# Altium PCB lab11.PcbDoc
Units mil, origin at the board's own origin, x right, y up, seen from the top; angles counter-clockwise.
Board outline 12125.98 x 8622.05 mil, 2 copper layers (Top Layer, Top, Bottom Layer, Bottom); 15 components, 10 nets, 39 pads, 0 vias.
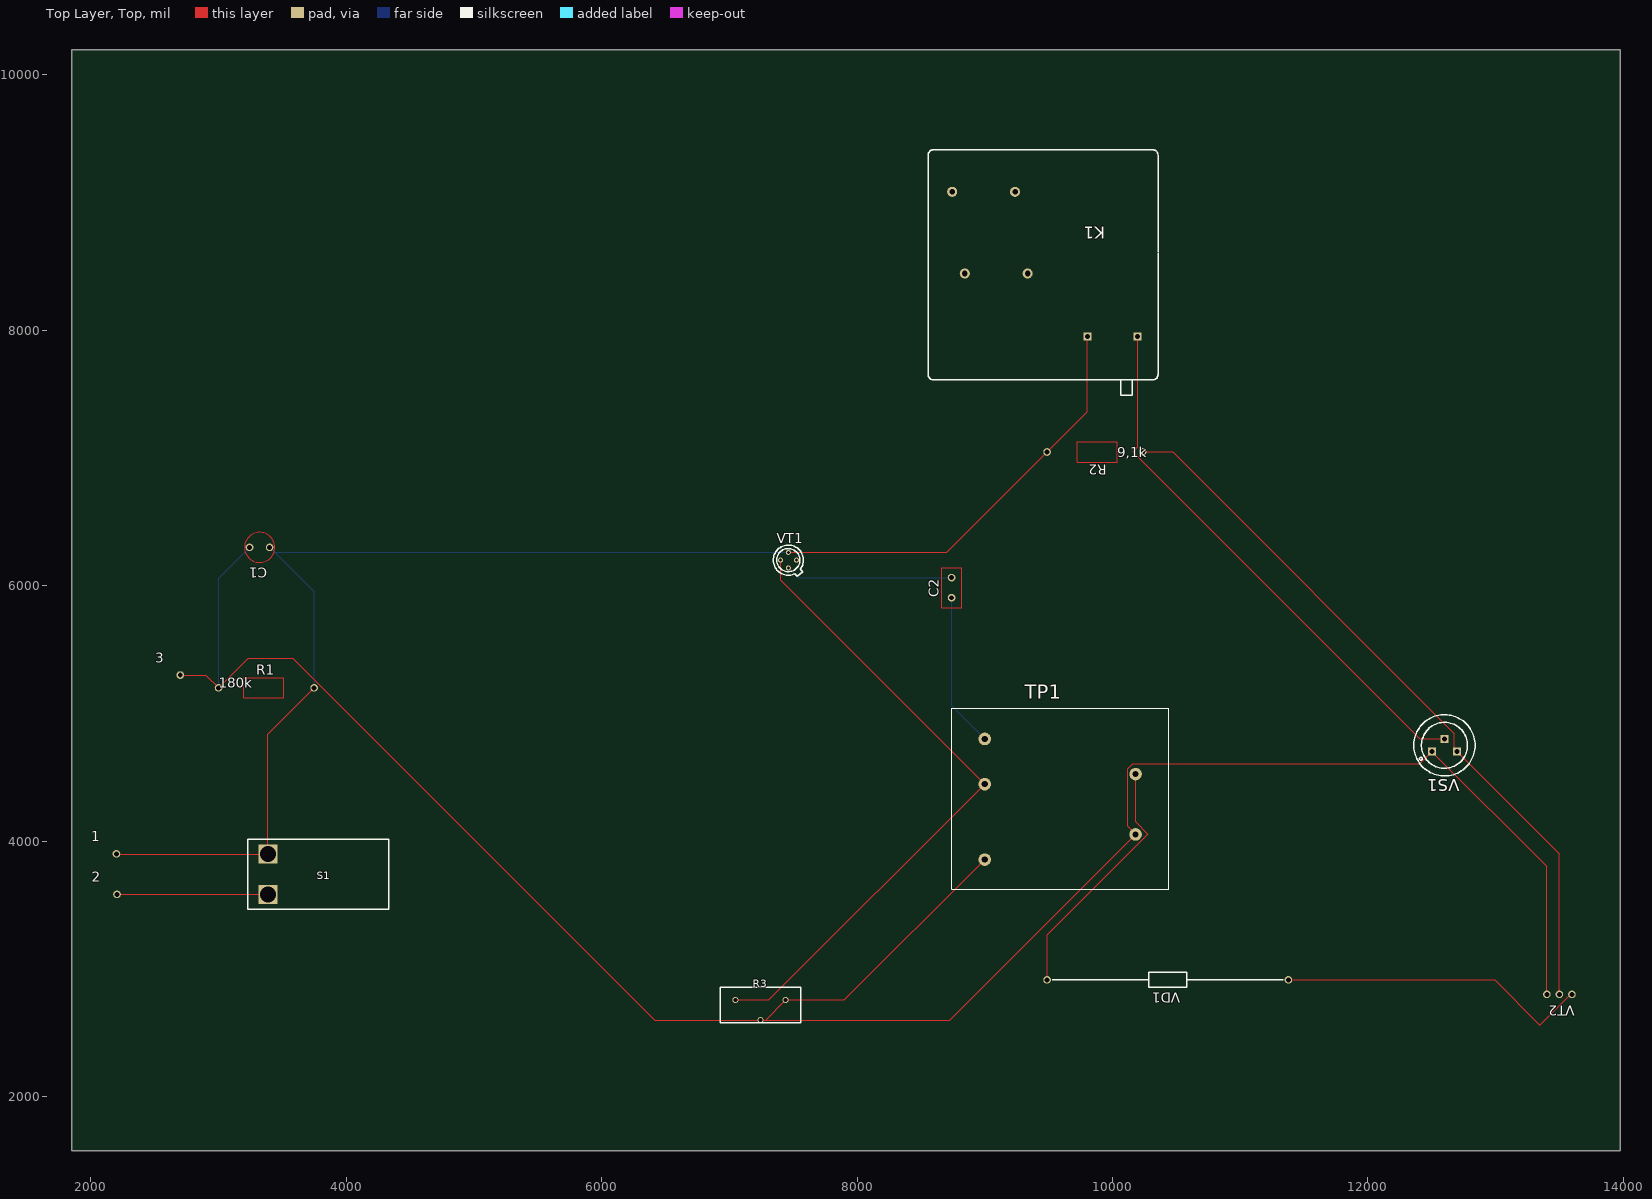
[diagram p0: Top Layer, Top view]
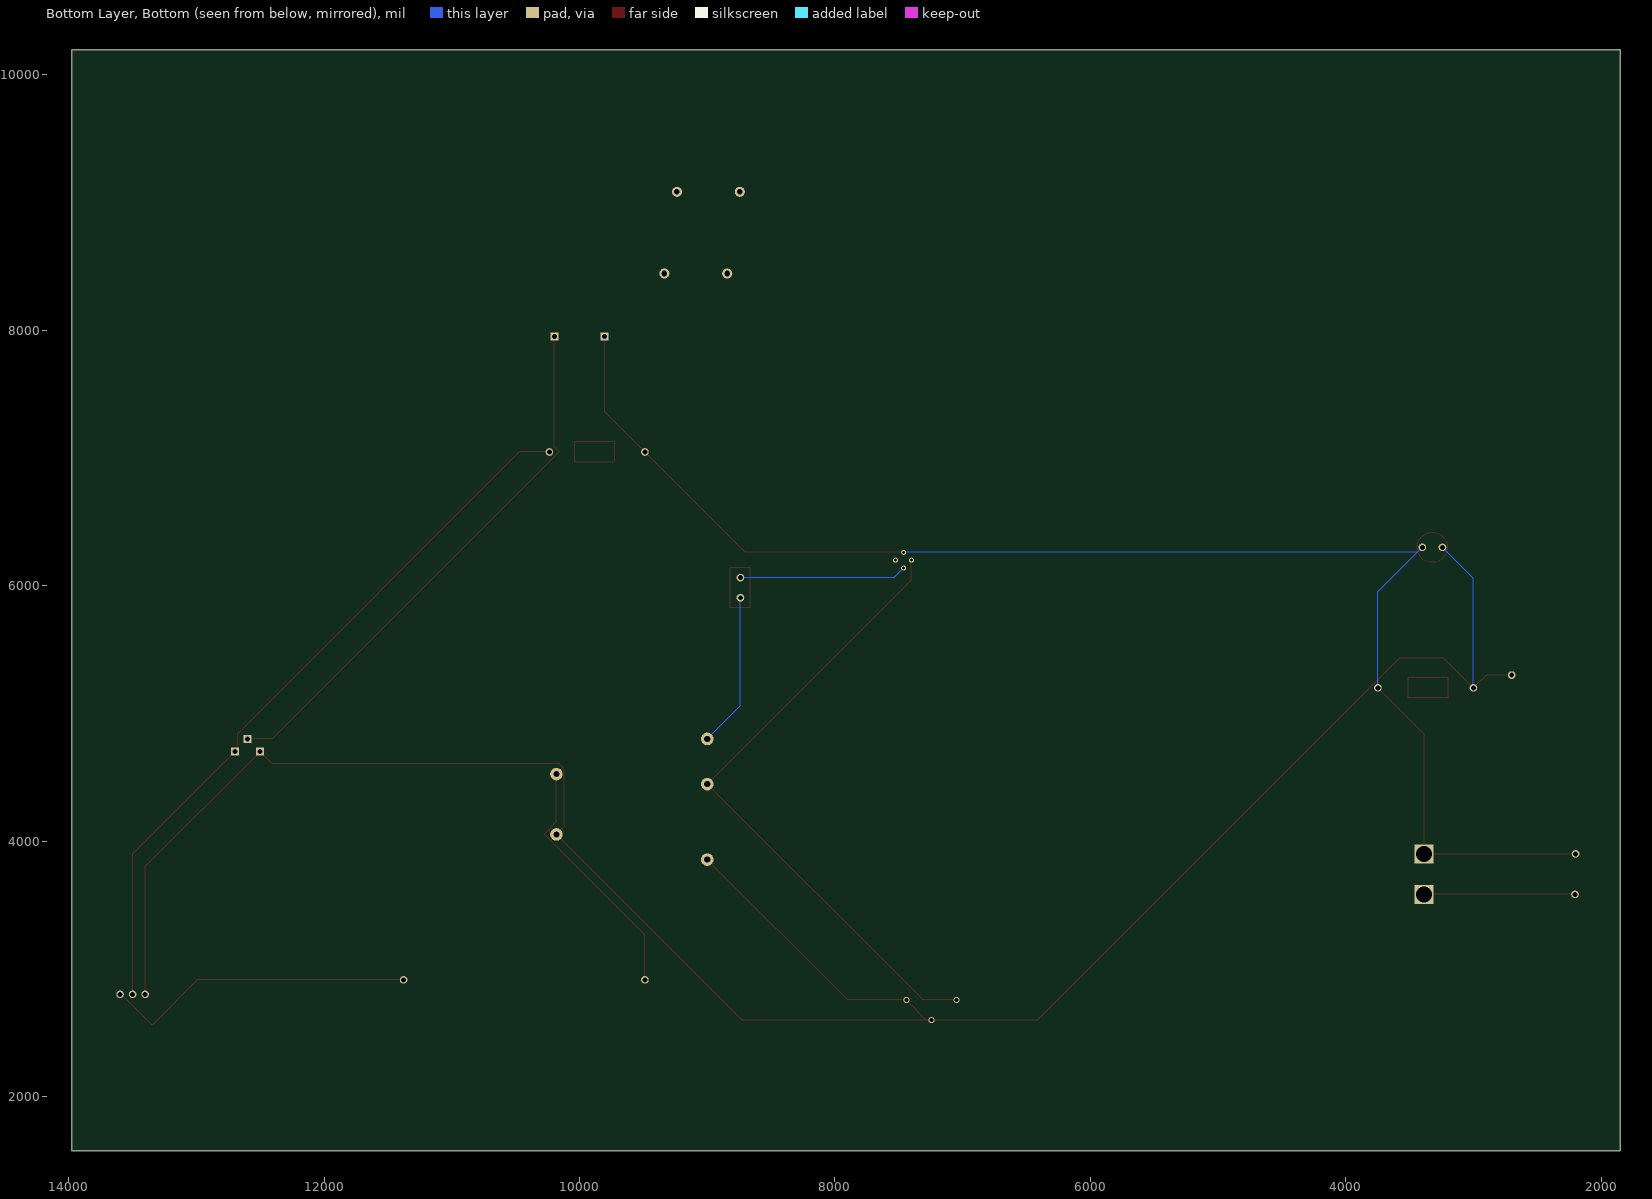
[diagram p1: Bottom Layer, Bottom view, seen from below]

## Layer stack, top to bottom
Top Solder, Top Mask: solder mask 0.4, Solder Resist, Dk 3.5
Top Layer, Top: signal copper 1.4
Dielectric 1: dielectric 12.6, FR-4, Dk 4.8
Bottom Layer, Bottom: signal copper 1.4
Bottom Solder, Bot Mask: solder mask 0.4, Solder Resist, Dk 3.5

## Board outline
1850.39,1574.8 13976.38,1574.8 13976.38,10196.85 1850.39,10196.85

## Design rules (kind name [scope] priority, off if disabled: settings)
Clearance [All] p1: gap=10 ignorepadtopadclearanceinfootprint=FALSE except(0: Arc-Hole Track-Hole SMDPad-Hole THPad-Hole Via-Hole Fill-Hole Poly-Hole Region-Hole Text-Hole; 11.81: Arc-Arc Arc-Track Arc-THPad Arc-Via Track-Track Track-THPad Track-Via THPad-THPad THPad-Via Via-Via)
PlaneClearance [All] p1: clearance=10
PolygonConnect [All] p1: connectstyle=Relief reliefconductorwidth=10 reliefentries=4 polygonreliefangle="90 Angle" airgapwidth=10
RoomDefinition [All] p1: confinementstyle=ConfineIn formatcopy=TRUE lockcomponents=FALSE outline 1850.39,1574.8 13976.38,1574.8 13976.38,10196.85 1850.39,10196.85
RoutingVias [All] p1: holewidth=28 width=50 viastyle="Through Hole" minholewidth=28 minwidth=50 maxholewidth=28 maxwidth=50
SolderMaskExpansion [All] p1: expansion=4 istentingtop=FALSE
Width [All] p1: maxlimit=10 minlimit=10 preferedwidth=10
29 further rules are at their usual default settings.

## Components (designator, comment, footprint, x,y, rotation, side; value= is the part's Value field where it differs from the comment)
1 "" A 2200,3900 r0 top
2 "+U 4,5...5V" A 2204.72,3582.68 r0 top
3 "-U" A 2700,5300 r0 top
C1 "10mk" CAP2 3400,6300 r180 top
C2 "47" CAP1 8740.16,5905.51 r90 top
K1 "" KUZ1 10196.85,7952.76 r180 top
R1 "180k" RES 3000,5200 r0 top
R2 "9,1k" RES 10236.22,7047.24 r180 top
R3 "560" СП3-38В 7047.24,2755.91 r0 top
S1 "{Value}" Т1 3385.83,3897.64 r0 top
TP1 "" TRANSFORMATOR 9000,4800 r0 top
VD1 "{Value}" D2 11377.95,2913.39 r180 top
VS1 "" KU101 12600,4800 r180 top
VT1 "" КП305 7400,6200 r0 top
VT2 "{Value}" KT-13 13500,2800 r90 top

## Footprints (in the part's own frame and the unit in brackets; to place one, negate y for a bottom-side part, rotate by r counter-clockwise, add the part's x,y. Pads: shape width x height; smd on the part's side, far side on the other; paste and mask are expansions set on the pad)
A [mil]
  round 60 hole 38: 1(0,0)
CAP1 [mil]
  round 60 hole 38: 1(0,0) 2(157.48,0)
  Top Layer, Top lines w3.94: -78.74,78.74 236.22,78.74 236.22,-78.74 -78.74,-78.74 -78.74,78.74
CAP2 [mil]
  round 60 hole 38: 1(0,0) 2(157.48,0)
  Top Layer, Top circle w3.94: c78.74,0 r118.11
D2 [mil]
  round 60 hole 38: 1(0,0) 2(1889.76,0)
  silkscreen extent 39,-59 1850,59
KT-13 [mm]
  round 1.5 hole 1: 1(0,-2.5) 2(0,0) 3(0,2.5)
KU101 [mm]
  rect 1.6x1.6 hole 1: 1(0,0) 2(2.5,2.5) 3(-2.5,2.5)
  silkscreen extent -6.1,-4.83 6.09,7.37
KUZ1 [mm]
  rect 1.6x1.6 hole 1: 1(0,0) 2(10,0)
  round 2 hole 1.1: 3(21.875,-12.5) 4(24.375,-28.75) 5(34.375,-12.5) 6(36.875,-28.75)
  silkscreen extent -4.06,-37.08 41.66,11.68
RES [mil]
  round 60 hole 38: 1(0,0) 2(748.03,0)
  Top Layer, Top lines w3.94: 196.85,-78.74 511.81,-78.74 511.81,78.74 196.85,78.74 196.85,-78.74
TRANSFORMATOR [mm]
  round 2.5 hole 1.2: 1(0,0) 2(0,-9) 3(0,-24) 4(30,-7) 5(30,-19)
  silkscreen extent -6.58,-29.86 36.62,6.14
КП305 [mm]
  round 1 hole 0.6: 1(0,0) 2(1.57,1.55) 3(1.57,-1.55) 4(3.18,0)
  silkscreen extent -1.42,-3.2 4.57,3
СП3-38В [mm]
  round 1.2 hole 0.8: 1(0,0) 2(10,0) 3(5,-4)
  silkscreen extent -3,-4.5 13,2.5
Т1 [mm]
  rect 3.8x3.8 hole 3.2: 1(0,0) 2(0,-8)
  silkscreen extent -4,-11 24,3

## Nets (pads, with @x,y where several pads share a name; then routed paths per layer and width w, separated by ;. In a path a pad name is that pad's centre, name@x,y a point inside that pad or via, vN(x,y) a via of type N, cw(c..) or ccw(c..) an arc to the next point about the centre after c; other vN are vias at no path point)
NET00000: 3.1 C1.2 R1.1 R3.2 R3.3 TP1.3 TP1.5 VS1.2 VT2.3 | length 18126.8
  Top Layer, Top w3.94: 3.1 2900,5300 R1.1 3233.07,5433.07 3582.68,5433.07 6417.32,2598.43 R3.3 ; TP1.3 7900.79,2755.91 R3.2 7283.46,2598.43 R3.3 ; VT2.3 13401.57,3801.57 VS1.2 12406.3,4606.3 10157.48,4606.3 10118.11,4566.93 10118.11,4114.96 TP1.5 8727.56,2598.43 R3.3
  Bottom Layer, Bottom w3.94: R1.1 3000,6057.48 C1.2
NET00001: R3.1 TP1.2 VT1.1 | length 5069.8
  Top Layer, Top w3.94: R3.1 7310.24,2755.91 TP1.2 7401.57,6044.09 7401.57,6198.43 VT1.1
NET00002: C2.2 VT1.3 | length 1309.8
  Bottom Layer, Bottom w3.94: VT1.3 7537.8,6062.99 C2.2
NET00003: C2.1 TP1.1 | length 1213.1
  Bottom Layer, Bottom w3.94: C2.1 8740.16,5059.84 TP1.1
NET00004: 1.1 C1.1 K1.2 R1.2 R2.2 S1.1 VT1.2 | length 11349.3
  Top Layer, Top w3.94: 1.1 2202.36,3897.64 S1.1 3385.83,4837.8 R1.2 ; VT1.2 8701.97,6261.02 R2.2 9803.15,7362.2 K1.2
  Bottom Layer, Bottom w3.94: R1.2 3748.03,5951.97 C1.1 3438.98,6261.02 VT1.2
NET00005: TP1.4 VD1.2 | length 1976.3
  Top Layer, Top w3.94: VD1.2 9488.19,3267.72 10275.59,4055.12 10181.1,4149.61 TP1.4
NET00006: VD1.1 VT2.1 | length 2467
  Top Layer, Top w3.94: VD1.1 12992.13,2913.39 13346.46,2559.06 13587.4,2800 VT2.1
NET00007: R2.1 VS1.3 VT2.2 | length 5737.5
  Top Layer, Top w3.94: R2.1 10472.44,7047.24 12677.17,4842.52 12677.17,4722.83 VS1.3 13500,3900 VT2.2
NET00008: K1.1 VS1.1 | length 4295.2
  Top Layer, Top w3.94: K1.1 10196.85,7086.61 10157.48,7047.24 12404.72,4800 VS1.1
NET00009: 2.1 S1.2 | length 1181.1
  Top Layer, Top w3.94: 2.1 S1.2
pads on no net: K1.3 K1.4 K1.5 K1.6 VT1.4